# Altium PCB OL_sensor_assy FPC.PcbDoc
Units mm, origin at the board's own origin, x right, y up, seen from the top; angles counter-clockwise.
Board outline 14.91 x 4.5 mm, 2 copper layers (Top Layer, Bottom Layer); 3 components, 5 nets, 15 pads, 7 vias.
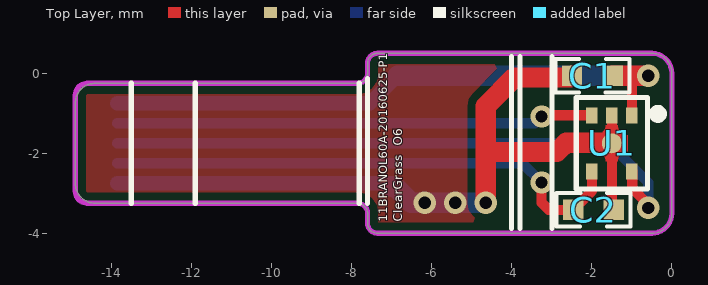
[diagram p0: Top Layer view]
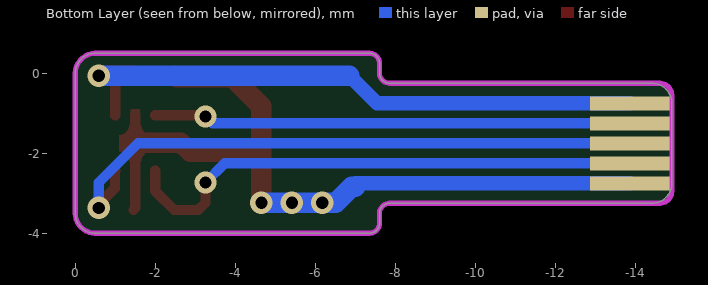
[diagram p1: Bottom Layer view, seen from below]

## Layer stack, top to bottom
Top Layer: signal copper 0.0356
Dielectric: dielectric 0.32, FR-4, Dk 4.8
Bottom Layer: signal copper 0.0356

## Board outline
-14.414,-3.25 -7.857,-3.25 cw(c-7.857,-3.5) -7.607,-3.5 -7.607,-3.75 ccw(c-7.357,-3.75) -7.357,-4 -0.5,-4 ccw(c-0.5,-3.5) 0,-3.5 0,0 ccw(c-0.5,0) -0.5,0.5 -7.357,0.5 ccw(c-7.357,0.25) -7.607,0.25 -7.607,0 cw(c-7.857,0) -7.857,-0.25 -14.414,-0.25 ccw(c-14.414,-0.75) -14.914,-0.75 -14.914,-2.75 ccw(c-14.414,-2.75)

## Design rules (kind name [scope] priority, off if disabled: settings)
Clearance [All] p1: gap=0.203
PolygonConnect [All] p1: connectstyle=Direct reliefconductorwidth=0.254 reliefentries=4 polygonreliefangle="90 Angle"
RoutingVias [All] p1: holewidth=0.711 width=1.27 viastyle="Through Hole" minholewidth=0.711 minwidth=1.27 maxholewidth=0.711 maxwidth=1.27
SilkscreenOverComponentPads [IsPad] p1: minsilkscreentomaskgap=0.254
SolderMaskExpansion [All] p1: expansion=0.102
Width [All] p1: maxlimit=0.508 minlimit=0.254 preferedwidth=0.254
27 further rules are at their usual default settings.

## Components (designator, comment, footprint, x,y, rotation, side; value= is the part's Value field where it differs from the comment)
C1 "0.1uF/10V" 0402C -1.986,-0.063 r0 top
C2 "0.1uF/10V" 0402C -1.96,-3.416 r180 top
U1 "BH1721FVC-TR" WSOF5 -1.5,-1.75 r270 top locked

## Footprints (in the part's own frame and the unit in brackets; to place one, negate y for a bottom-side part, rotate by r counter-clockwise, add the part's x,y. Pads: shape width x height; smd on the part's side, far side on the other; paste and mask are expansions set on the pad)
0402C [mil]
  rect 20x20 smd: 1(20,0) 2(-20,0)
  silkscreen extent -36,-16 36,17, body extent -34,-14 34,14, height 20
WSOF5 [mm] "SOT23, 5-Leads, Body 1.6x1.6mm (max), Pitch 0.50mm, IPC Medium Density"
  rect 0.4x0.28 smd: 1(-0.7,0.5) 2(-0.7,0) 3(-0.7,-0.5) 4(0.7,-0.5) 5(0.7,0.5)
  round 0.5 smd: 2(0,0)
  Top Layer region: -0.455,0.15 -0.33,0.183 -0.238,0.275 -0.205,0.4 -0.205,0.4 0.205,0.4 0.205,0.4 0.238,0.275 0.33,0.183 0.455,0.15 0.455,0.15 0.455,0.11 0.65,0.11 0.65,-0.11 0.455,-0.11 0.455,-0.15 0.33,-0.183 0.238,-0.275 0.205,-0.4 0.205,-0.4 -0.205,-0.4 -0.238,-0.275 -0.33,-0.183 -0.455,-0.15 -0.455,-0.15 -0.455,-0.11 -0.85,-0.11 -0.85,0.11 -0.455,0.11
  silkscreen extent -1.14,-0.89 1.14,1.25, body extent -1,-0.74 1,0.74, height 0.6

## Part data
C1 C2: library part CAP, "厂?"

## Free pads (board coordinates)
  rect 2x0.35 smd far side: 1(-13.864,-2.75) 2(-13.864,-2.25) 3(-13.864,-1.75) 4(-13.864,-1.25) 5(-13.864,-0.75)

## Via types
v1: diameter 0.559, hole 0.305, Top Layer to Bottom Layer, tented both sides, 7 vias

## Nets (pads, with @x,y where several pads share a name; then routed paths per layer and width w, separated by ;. In a path a pad name is that pad's centre, name@x,y a point inside that pad or via, vN(x,y) a via of type N, cw(c..) or ccw(c..) an arc to the next point about the centre after c; other vN are vias at no path point)
3.3V: C1.1 pad.5 U1.1 | length 15.4
  Top Layer w0.254: U1.1 -1,-0.093
  Top Layer w0.508: C1.1 v1(-0.589,-0.063)
  Bottom Layer w0.356: pad.5 -7.545,-0.75 -6.858,-0.063
  Bottom Layer w0.508: -6.858,-0.063 v1(-0.589,-0.063)
GND: C1.2 C2.2 pad.1 U1.2 | length 19.9
  Top Layer w0.254: U1.2@-1.5,-1.035 -1.5,-1.05 -1.5,-1.735 -1.5,-1.75 -1.5,-3.368 C2.2
  Top Layer w0.508: v1(-4.653,-3.238) -4.653,-1.968 ; C1.2 -2.537,-0.106 -3.934,-0.106 -4.653,-0.825 -4.653,-1.968 ; U1.2@-1.5,-1.735 -2.642,-1.735 -2.875,-1.968 -4.653,-1.968
  Bottom Layer w0.356: pad.1 -6.999,-2.75
  Bottom Layer w0.508: -6.999,-2.834 -6.915,-2.834 -6.511,-3.238 v1(-4.653,-3.238)
  other v1: -6.177,-3.238 -5.415,-3.238
OL_RESET: C2.1 pad.2 U1.4 | length 13.4
  Top Layer w0.254: v1(-3.256,-2.73) -3.256,-3.238 -3.078,-3.416 C2.1 -2,-2.947 U1.4 U1.4@-2,-2.435
  Bottom Layer w0.254: pad.2 -3.736,-2.25 v1(-3.256,-2.73)
OL_SCL: pad.3 U1.5 | length 15.4
  Top Layer w0.254: U1.5@-1,-2.435 -0.99,-2.445 -0.99,-2.878 -0.589,-3.279 v1(-0.589,-3.365)
  Bottom Layer w0.254: pad.3 -1.569,-1.75 -0.589,-2.73 v1(-0.589,-3.365)
OL_SDA: pad.4 U1.3 | length 11.9
  Top Layer w0.254: v1(-3.256,-1.079) -3.227,-1.05 U1.3
  Bottom Layer w0.254: pad.4 -3.427,-1.25 v1(-3.256,-1.079)

## Polygon pours and split planes (outlines as drawn)
GND on Top Layer "Bottom Layer-No Net" (solid, remove dead copper, pour order 6): -15.24,0.254 -15.113,0.381 -8.128,0.381 -8.128,1.651 -8.001,1.778 0.635,1.778 0.635,-4.318 1.016,-4.699 -14.986,-4.699

## Keep-outs
Keep-Out Layer:
  lines w0.127: -14.914,-2.95 ccw(c-14.614,-2.95) -14.614,-3.25 -7.857,-3.25 cw(c-7.857,-3.5) -7.607,-3.5 -7.607,-3.75 ccw(c-7.357,-3.75) -7.357,-4 -0.5,-4 ccw(c-0.5,-3.5) 0,-3.5 0,0 ccw(c-0.5,0) -0.5,0.5 -7.357,0.5 ccw(c-7.357,0.25) -7.607,0.25 -7.607,0 cw(c-7.857,0) -7.857,-0.25 -14.614,-0.25 ccw(c-14.614,-0.55) -14.914,-0.55 -14.914,-2.95

## Silkscreen, mask and mechanical layers (free items; w line width, h text height)
Top Overlay:
  lines w0.127: -13.514,-3.25 -13.514,-0.25 ; -11.914,-3.25 -11.914,-0.25 ; -7.814,-3.25 -7.814,-0.25 ; -7.607,-3.25 -7.607,-0.135 ; -4.007,-3.885 -4.007,0.415 ; -3.8,-3.885 -3.8,0.415 ; -3,-3.885 -3,0.415
  text "O6" at -6.659,-1.807 h0.38 r90
  text "11BRANOL60A-20160625-P1" at -7.04,-3.712 h0.36 r90
  text "ClearGrass" at -6.659,-3.712 h0.38 r90
Mechanical 7:
  circle w0.127: c-1.5,-1.735 r0.4